# Altium PCB Madromys.PcbDoc (part 2 of 2)
Units mm, origin at the board's own origin, x right, y up, seen from the top; angles counter-clockwise.
Board outline 61.8 x 82.5 mm, 4 copper layers (Top Layer, Plane 1, Plane 2, Bottom Layer), stack 0.781 mm thick; 86 components, 51 nets, 306 pads, 237 vias.
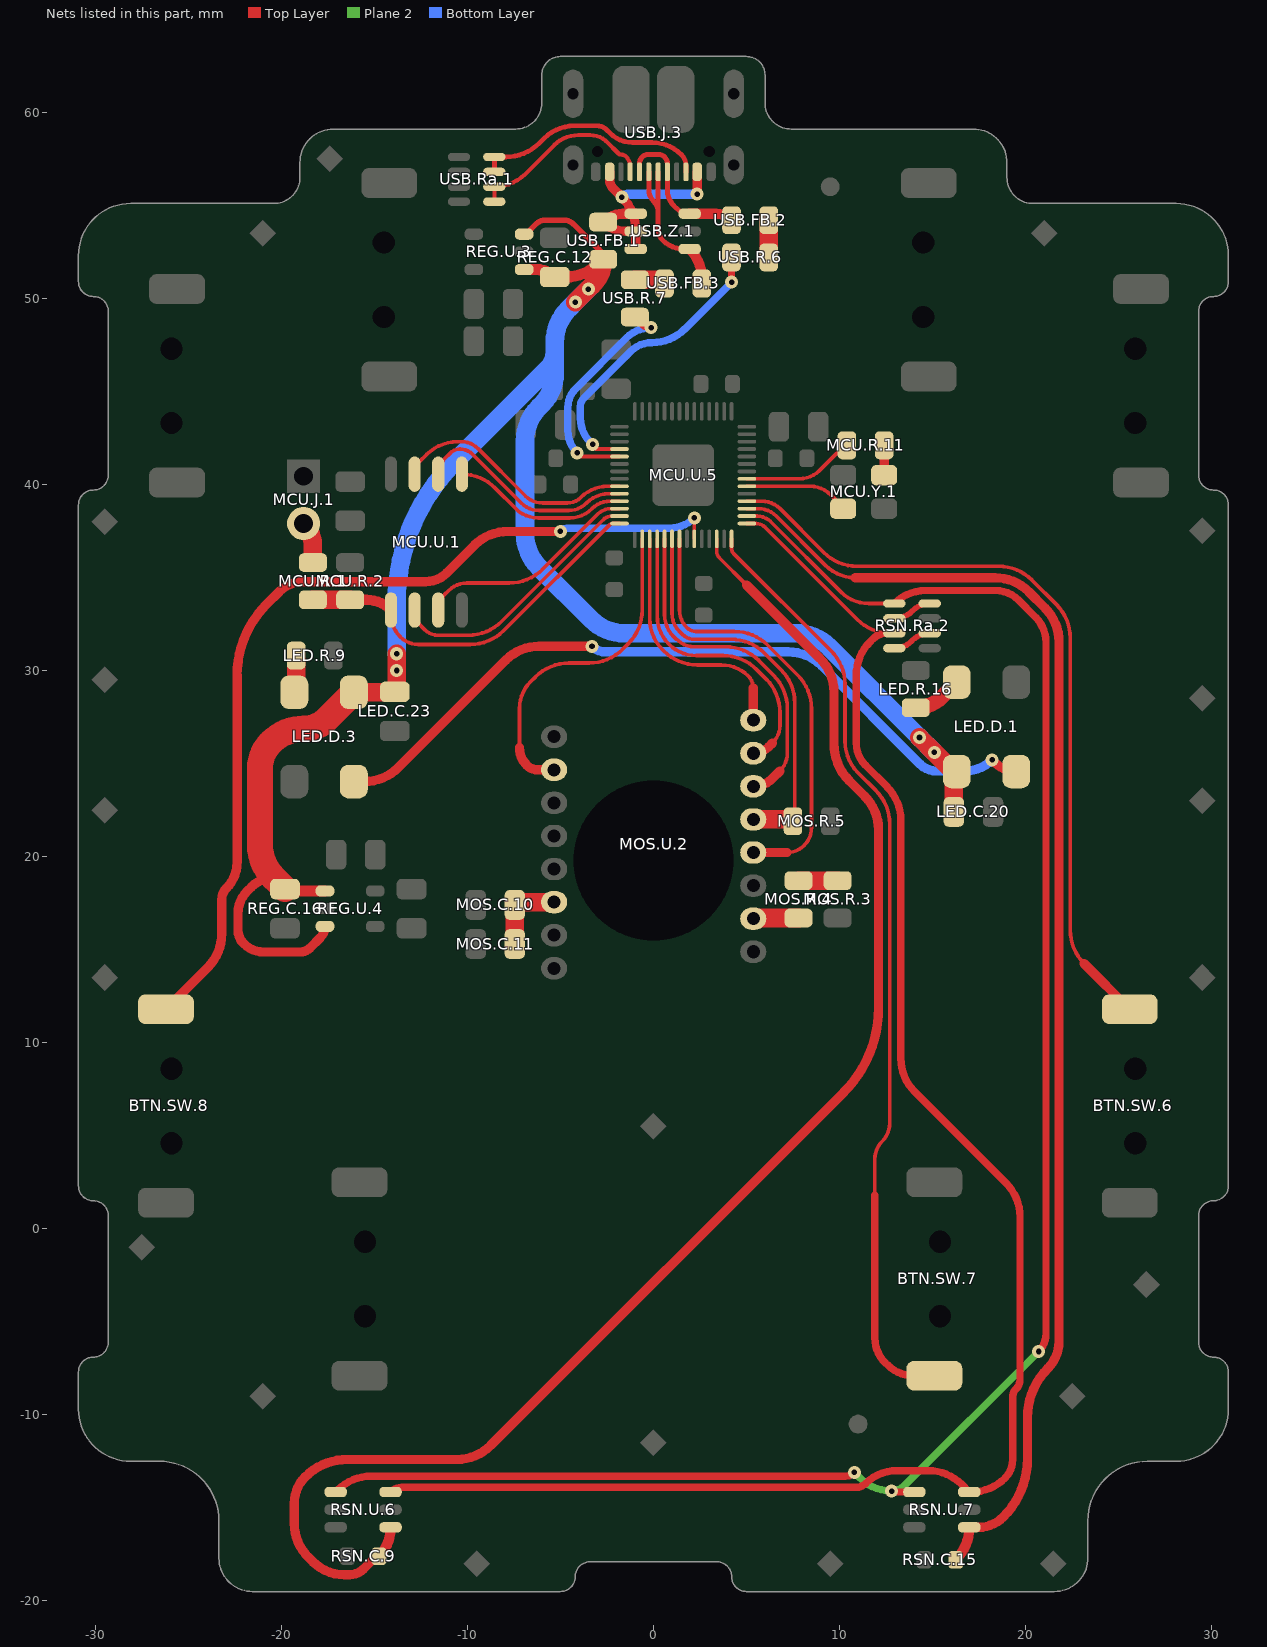
[diagram p4: the nets of this part, all layers, seen from the top]

## Via types
v1: diameter 0.7, hole 0.3, Top Layer to Bottom Layer, tented both sides, 217 vias
v2: diameter 1.016, hole 0.508, Top Layer to Bottom Layer, tented both sides, 20 vias

## Nets (pads, with @x,y where several pads share a name; then routed paths per layer and width w, separated by ;. In a path a pad name is that pad's centre, name@x,y a point inside that pad or via, vN(x,y) a via of type N, cw(c..) or ccw(c..) an arc to the next point about the centre after c; other vN are vias at no path point) (continued)
NetBTN.SW.6_B: BTN.SW.6.B MCU.U.5.18 | length 41.8
  Top Layer w0.2: MCU.U.5.18@5.025,39.1 5.834,39.1 cw(c5.834,37.734) 6.8,38.7 9.156,36.344 ccw(c10.952,38.14) 10.952,35.6 18.548,35.6 cw(c18.548,33.06) 20.344,34.856 21.656,33.544 cw(c19.86,31.748) 22.4,31.748 22.4,16.052 ccw(c24.94,16.052) 23.144,14.256
  Top Layer w0.5: 23.144,14.256 BTN.SW.6.B@25.6,11.8
NetBTN.SW.7_A: BTN.SW.7.A MCU.U.5.14 | length 50.7
  Top Layer w0.2: MCU.U.5.14@4.2,37.075 4.2,36.55 ccw(c4.562,36.55) 4.306,36.294 9.556,31.044 cw(c7.76,29.248) 10.3,29.248 10.3,26.19 ccw(c12.69,26.19) 11,24.5 11.956,23.544 cw(c10.16,21.748) 12.7,21.748 12.7,5.666 cw(c11.334,5.666) 12.3,4.7 ccw(c13.266,3.734) 11.9,3.734 11.9,1.8
  Top Layer w0.4: 11.9,1.8 11.9,-5.873 ccw(c13.778,-5.873) 12.612,-7.345 ccw(c13.952,-6.005) 13.952,-7.9 BTN.SW.7.A@15.1,-7.9
NetBTN.SW.8_B: BTN.SW.8.B MCU.U.5.9 | length 49.2
  Top Layer w0.2: MCU.U.5.9@2.2,37.075 v1(2.2,38.2)
  Top Layer w0.5: BTN.SW.8.B@-26.2,11.8 -23.944,14.056 ccw(c-25.74,15.852) -23.2,15.852 -23.2,17.696 cw(c-22.346,17.696) -22.95,18.3 ccw(c-24.338,19.688) -22.375,19.688 -22.375,29.733 cw(c-16.963,29.733) -20.79,33.56 -20.102,34.248 cw(c-18.83,32.976) -18.83,34.775 -12.247,34.775 ccw(c-12.247,36.397) -11.1,35.25 -9.619,36.731 cw(c-7.823,34.935) -7.823,37.475 v1(-5,37.475)
  Bottom Layer w0.4: v1(-5,37.475) cw(c-4.578,37.053) -4.578,37.65 0.872,37.65 ccw(c0.872,39.528) v1(2.2,38.2)
NetLED.D.1_2: LED.D.1.2 LED.D.3.4 | length 41.3
  Top Layer w0.5: LED.D.3.4@-16.1,24.03 -15.523,24.03 ccw(c-15.523,26.57) -13.726,24.774 -7.944,30.556 cw(c-6.148,28.76) -6.148,31.3 v1(-3.3,31.3) ; v1(18.2,25.2) 18.355,25.045 ccw(c19.5,26.189) LED.D.1.2@19.5,24.57
  Bottom Layer w0.5: v1(-3.3,31.3) ccw(c-2.576,32.024) -2.576,31 7.248,31 cw(c7.248,28.46) 9.044,30.256 14.346,24.954 ccw(c15.2,25.807) 15.2,24.6 16.751,24.6 ccw(c16.751,26.649) v1(18.2,25.2)
NetLED.D.1_4: LED.D.1.4 LED.R.16.1 | length 2.7
  Top Layer w0.8: LED.R.16.1@14.1,27.998 ccw(c14.1,29.996) 15.513,28.583 LED.D.1.4@16.3,29.37
NetLED.D.3_2: LED.D.3.2 LED.R.9.2 | length 2
  Top Layer w1: LED.D.3.2@-19.3,28.83 ccw(c-19.536,29.066) -19.202,29.066 LED.R.9.2@-19.202,30.8
NetMCU.J.1_2: MCU.J.1.2 MCU.R.1.1 | length 2.2
  Top Layer w1: MCU.J.1.2@-18.8,37.9 cw(c-20.007,36.693) -18.3,36.693 MCU.R.1.1@-18.3,35.802
NetMCU.R.1_2: MCU.R.1.2 MCU.R.2.2 MCU.U.1.1 MCU.U.5.56 | length 20.4
  Top Layer w0.2: MCU.U.1.1@-14.105,33.25 -14.105,33.019 ccw(c-12.381,33.019) -13.6,31.8 ccw(c-12.634,32.766) -12.634,31.4 -9.838,31.4 ccw(c-9.838,33.94) -8.042,32.144 -2.393,37.793 cw(c-2.134,37.534) -2.134,37.9 MCU.U.5.56@-1.825,37.9
  Top Layer w0.55: MCU.R.2.2@-16.3,33.798 -15.427,33.798 cw(c-15.427,31.928) MCU.U.1.1@-14.105,33.25
  Top Layer w1: MCU.R.1.2@-18.3,33.798 MCU.R.2.2@-16.3,33.798
NetMCU.R.11_1: MCU.R.11.1 MCU.U.5.21 | length 6
  Top Layer w0.2: MCU.U.5.21@5.025,40.3 7.839,40.3 ccw(c7.839,41.836) 8.925,40.75 10.188,42.013 cw(c10.398,41.804) MCU.R.11.1@10.398,42.1
NetMCU.R.11_2: MCU.R.11.2 MCU.Y.1.3 | length 1.6
  Top Layer w0.5: MCU.Y.1.3@12.4,40.5 12.402,40.502 MCU.R.11.2@12.402,42.1
NetMCU.U.1_2: MCU.U.1.2 MCU.U.5.55 | length 14.3
  Top Layer w0.2: MCU.U.1.2@-12.835,33.25 ccw(c-11.591,33.25) -12.471,32.371 -12.3,32.2 ccw(c-11.576,32.924) -11.576,31.9 -9.952,31.9 ccw(c-9.952,34.44) -8.156,32.644 -2.7,38.1 cw(c-2.217,37.617) -2.25,38.299 cw(c-2.225,37.9) -2.225,38.3 MCU.U.5.55@-1.825,38.3
NetMCU.U.1_3: MCU.U.1.3 MCU.U.5.54 | length 12
  Top Layer w0.2: MCU.U.1.3@-11.565,33.25 cw(c-10.394,33.25) -11.222,34.078 -11,34.3 cw(c-10.034,33.334) -10.034,34.7 -7.752,34.7 ccw(c-7.752,37.24) -5.956,35.444 -3,38.4 cw(c-2.276,37.676) -2.276,38.7 MCU.U.5.54@-1.825,38.7
NetMCU.U.1_5: MCU.U.1.5 MCU.U.5.53 | length 9.5
  Top Layer w0.2: MCU.U.1.5@-10.295,40.55 cw(c-10.295,38.028) -8.511,39.811 -7.4,38.7 ccw(c-6.193,39.907) -6.193,38.2 -4.5,38.2 ccw(c-4.5,39.89) -3.306,38.694 -3.3,38.7 cw(c-2.334,37.734) -2.334,39.1 MCU.U.5.53@-1.825,39.1
NetMCU.U.1_6: MCU.U.1.6 MCU.U.5.52 | length 12
  Top Layer w0.2: MCU.U.1.6@-11.565,40.55 cw(c-10.394,40.55) -11.222,41.378 -10.912,41.688 cw(c-10.4,41.176) -10.4,41.9 cw(c-10.4,40.934) -9.717,41.617 -7.1,39 ccw(c-6.134,39.966) -6.134,38.6 -4.566,38.6 ccw(c-4.566,39.966) -3.6,39 cw(c-2.393,37.793) -2.393,39.5 MCU.U.5.52@-1.825,39.5
NetMCU.U.1_7: MCU.U.1.7 MCU.U.5.51 | length 13.3
  Top Layer w0.2: MCU.U.1.7@-12.835,40.55 cw(c-11.833,40.55) -12.541,41.259 -12.2,41.6 cw(c-10.51,39.91) -10.51,42.3 -10.317,42.3 cw(c-10.317,41.051) -9.434,41.934 -6.888,39.388 ccw(c-5.951,40.324) -5.951,39 -4.624,39 ccw(c-4.624,40.024) -3.9,39.3 cw(c-2.451,37.851) -2.451,39.9 MCU.U.5.51@-1.825,39.9
NetMCU.U.5_2: MCU.U.5.2 MOS.U.2.7 | length 18
  Top Layer w0.2: -7.2,25.866 -7.2,27.951 cw(c-5.151,27.951) -6.6,29.4 -6.344,29.656 cw(c-4.548,27.86) -4.548,30.4 -3.452,30.4 ccw(c-3.452,32.94) -1.656,31.144 -1.344,31.456 ccw(c-3.14,33.252) -0.6,33.252 MCU.U.5.2@-0.6,37.075
  Top Layer w0.5: -7.2,25.866 ccw(c-5.834,25.866) -6.8,24.9 ccw(c-6.228,25.472) -6.228,24.663 MOS.U.2.7@-5.334,24.663
NetMCU.U.5_3: MCU.U.5.3 MOS.U.2.9 | length 13.6
  Top Layer w0.2: MCU.U.5.3@-0.2,37.075 -0.2,32.79 ccw(c2.19,32.79) 0.5,31.1 0.556,31.044 ccw(c2.352,32.84) 2.352,30.3 3.651,30.3 cw(c3.651,28.251) 5.1,29.7 cw(c4.457,29.057) 5.366,29.057
  Top Layer w0.5: MOS.U.2.9@5.366,27.33 5.366,29.057
NetMCU.U.5_4: MCU.U.5.4 MOS.U.2.10 | length 16.6
  Top Layer w0.2: MCU.U.5.4@0.2,37.075 0.2,32.93 ccw(c2.33,32.93) 0.824,31.424 0.845,31.403 ccw(c2.3,32.857) 2.3,30.8 3.748,30.8 cw(c3.748,28.26) 5.544,30.056 6.056,29.544 cw(c4.26,27.748) 6.8,27.748 6.8,27.066 cw(c5.434,27.066) 6.4,26.1
  Top Layer w0.5: MOS.U.2.10@5.366,25.552 ccw(c5.366,26.725) 6.195,25.895 6.4,26.1
NetMCU.U.5_5: MCU.U.5.5 MOS.U.2.11 | length 18.6
  Top Layer w0.2: MCU.U.5.5@0.6,37.075 0.6,33.007 ccw(c2.307,33.007) 1.1,31.8 1.105,31.795 ccw(c2.3,32.99) 1.334,31.604 ccw(c2.2,32.573) 2.2,31.273 3.875,31.273 cw(c3.875,28.733) 5.671,30.529 6.456,29.744 cw(c4.66,27.948) 7.2,27.948 7.2,25.566 cw(c5.834,25.566) 6.8,24.6
  Top Layer w0.5: MOS.U.2.11@5.366,23.774 ccw(c5.366,25.241) 6.404,24.204 6.8,24.6
NetMCU.U.5_6: MCU.U.5.6 MOS.R.5.1 MOS.U.2.12 | length 21.8
  Top Layer w0.2: MCU.U.5.6@1,37.075 1,33.065 ccw(c2.365,33.065) 1.4,32.1 1.564,31.936 ccw(c2.2,32.573) 2.2,31.673 4.175,31.673 cw(c4.175,29.133) 5.971,30.929 6.856,30.044 cw(c5.06,28.248) 7.6,28.248 7.6,22.147 cw(c7.251,22.147) MOS.R.5.1@7.498,21.9
  Top Layer w1: MOS.U.2.12@5.366,21.996 7.266,21.996 cw(c7.266,21.668) MOS.R.5.1@7.498,21.9
NetMCU.U.5_7: MCU.U.5.7 MOS.U.2.13 | length 24
  Top Layer w0.2: MCU.U.5.7@1.4,37.075 1.4,33.265 ccw(c2.765,33.265) 1.8,32.3 ccw(c2.283,32.783) 2.283,32.1 4.348,32.1 cw(c4.348,29.56) 6.144,31.356 7.756,29.744 cw(c5.96,27.948) 8.5,27.948 8.5,21.566 cw(c7.134,21.566) 8.1,20.6 cw(c7.178,21.522) 7.178,20.218
  Top Layer w0.5: MOS.U.2.13@5.366,20.218 7.178,20.218
NetMCU.U.5_12: MCU.U.5.12 RSN.C.9.2 RSN.U.6.4 | length 81.9
  Top Layer w0.2: MCU.U.5.12@3.4,37.075 3.4,36.388 ccw(c3.883,36.4) 3.541,36.059 5,34.6
  Top Layer w0.5: RSN.C.9.2@-14.75,-17.6 ccw(c-14.75,-17.962) -15.006,-17.706 -15.6,-18.3 cw(c-16.324,-17.576) -16.324,-18.6 -16.61,-18.6 cw(c-16.61,-16.21) -18.3,-17.9 -18.556,-17.644 cw(c-16.76,-15.848) -19.3,-15.848 -19.3,-14.752 cw(c-17.299,-14.752) -18.714,-13.337 cw(c-16.451,-15.6) -16.451,-12.4 -10.552,-12.4 ccw(c-10.552,-9.86) -8.756,-11.656 10.222,7.322 ccw(c5.689,11.856) 12.1,11.856 12.1,21.448 ccw(c9.56,21.448) 11.356,23.244 10.524,24.076 cw(c12.514,26.066) 9.7,26.066 9.7,28.848 ccw(c7.16,28.848) 8.956,30.644 5,34.6 ; RSN.U.6.4@-14.125,-16.05 RSN.U.6.4@-13.786,-16.05
  Top Layer w0.55: RSN.C.9.2@-14.75,-17.6 ccw(c-16.259,-16.091) -14.125,-16.091 RSN.U.6.4@-14.125,-16.05
NetMCU.U.5_15: MCU.U.5.15 RSN.Ra.2.3 RSN.U.6.6 RSN.U.7.6 | length 94
  Top Layer w0.2: MCU.U.5.15@5.025,37.9 5.517,37.9 cw(c5.517,37.217) 6,37.7 10.956,32.744 ccw(c12.752,34.54) RSN.Ra.2.3@12.752,32
  Top Layer w0.4: RSN.U.6.6@-14.125,-14.15 cw(c-13.521,-14.754) -13.521,-13.9 10.917,-13.9 ccw(c10.917,-13.217) 11.4,-13.7 cw(c13.09,-15.39) 13.09,-13 14.773,-13 cw(c14.773,-15.54) 16.569,-13.744 RSN.U.7.6@16.975,-14.15 17.098,-14.15 ccw(c17.098,-11.61) 18.894,-13.406 18.9,-13.4 ccw(c17.934,-12.434) 19.3,-12.434 19.3,-9.083 cw(c19.983,-9.083) 19.5,-8.6 ccw(c19.017,-8.117) 19.7,-8.117 19.7,0.648 ccw(c17.16,0.648) 18.956,2.444 14.044,7.356 cw(c15.84,9.152) 13.3,9.152 13.3,21.948 ccw(c10.76,21.948) 12.556,23.744 11.4,24.9 cw(c12.607,26.107) 10.9,26.107 10.9,29.748 cw(c13.44,29.748) 11.644,31.544 11.8,31.7 cw(c12.524,30.976) 12.524,32 12.752,32 RSN.Ra.2.3@12.95,32
NetMCU.U.5_16: MCU.U.5.16 RSN.Ra.2.1 RSN.U.6.1 RSN.U.7.1 | length 100.4
  Top Layer w0.2: MCU.U.5.16@5.025,38.3 5.576,38.3 cw(c5.576,37.276) 6.3,38 10.082,34.218 ccw(c11.574,35.711) 11.574,33.6 RSN.Ra.2.1@12.95,33.6
  Top Layer w0.4: RSN.U.6.1@-17.075,-14.15 -16.969,-14.044 cw(c-15.173,-15.84) -15.173,-13.3 10.317,-13.3 ccw(c10.317,-12.617) v1(10.8,-13.1) ; v1(12.8,-14.1) ccw(c12.921,-13.979) 12.921,-14.15 RSN.U.7.1@14.025,-14.15 ; RSN.Ra.2.1@12.95,33.6 cw(c14.64,31.91) 14.64,34.3 18.393,34.3 cw(c18.393,32.593) 19.6,33.8 20.534,32.866 cw(c19.169,31.5) 21.1,31.5 21.1,-5.634 cw(c19.734,-5.634) v1(20.7,-6.6)
  Plane 2 w0.4: v1(10.8,-13.1) 11.093,-13.393 ccw(c12.8,-11.686) v1(12.8,-14.1) ccw(c12.8,-13.134) 13.483,-13.817 v1(20.7,-6.6)
NetMCU.U.5_17: MCU.U.5.17 RSN.C.15.2 RSN.U.7.4 | length 71.7
  Top Layer w0.2: MCU.U.5.17@5.025,38.7 5.634,38.7 cw(c5.634,37.334) 6.6,38.3 9.251,35.649 ccw(c10.85,37.247) 10.85,34.986
  Top Layer w0.5: 10.85,34.986 18.362,34.986 cw(c18.362,32.446) 20.158,34.242 21.056,33.344 cw(c19.26,31.548) 21.8,31.548 21.8,-6.051 cw(c19.751,-6.051) 21.2,-7.5 ccw(c23.856,-10.156) 20.1,-10.156 20.1,-12.362 cw(c15.662,-12.362) 18.8,-15.5 cw(c17.472,-14.172) 17.472,-16.05 RSN.U.7.4@16.975,-16.05
  Top Layer w0.55: RSN.C.15.2@16.25,-17.8 ccw(c14.501,-16.05) RSN.U.7.4@16.975,-16.05
NetMCU.U.5_20: MCU.U.5.20 MCU.Y.1.1 | length 5.6
  Top Layer w0.2: MCU.U.5.20@5.025,39.9 8.417,39.9 cw(c8.417,38.312) 9.54,39.435 MCU.Y.1.1@10.147,38.828 ; MCU.Y.1.1@10.147,38.828 cw(c10.019,38.7) MCU.Y.1.1@10.2,38.7
NetMCU.U.5_46: MCU.U.5.46 USB.R.6.2 | length 16
  Top Layer w0.2: v1(-3.271,42.15) -3.3,42.121 -3.3,42.1 -3.1,41.9 MCU.U.5.46@-1.825,41.9
  Top Layer w0.4: USB.R.6.2@4.195,52.2 4.195,50.88 v1(4.2,50.875)
  Bottom Layer w0.4: v1(-3.271,42.15) -3.398,42.277 cw(c-2.124,43.55) -3.925,43.55 -3.925,44.203 cw(c-3.328,44.203) -3.75,44.625 -1.227,47.148 cw(c-0.075,45.995) -0.075,47.625 ccw(c-0.075,50.1) 1.675,48.35 v1(4.2,50.875)
NetMCU.U.5_47: MCU.U.5.47 USB.R.7.2 | length 12.5
  Top Layer w0.2: v1(-4.1,41.7) -3.9,41.5 MCU.U.5.47@-1.825,41.5
  Top Layer w0.4: USB.R.7.2@-1,48.998 -0.641,48.639 ccw(c-0.125,49.155) v1(-0.125,48.425)
  Bottom Layer w0.4: v1(-4.1,41.7) cw(c-2.893,42.907) -4.6,42.907 -4.6,44.125 cw(c-3.151,44.125) -4.176,45.149 -1.448,47.877 cw(c-0.125,46.554) v1(-0.125,48.425)
NetMOS.C.10_2: MOS.C.10.2 MOS.C.11.2 MOS.U.2.3 | length 4.3
  Top Layer w1: MOS.C.11.2@-7.447,15.3 MOS.C.10.2@-7.447,17.4 cw(c-7.083,17.035) -7.083,17.551 MOS.U.2.3@-5.334,17.551
NetMOS.R.3_1: MOS.R.3.1 MOS.R.4.2 | length 2.1
  Top Layer w1: MOS.R.4.2@7.8,18.702 MOS.R.3.1@9.9,18.702
NetMOS.R.4_1: MOS.R.4.1 MOS.U.2.15 | length 2.4
  Top Layer w1: MOS.U.2.15@5.366,16.662 cw(c5.452,16.576) 5.452,16.698 MOS.R.4.1@7.8,16.698
NetRSN.Ra.2_2: RSN.Ra.2.2 RSN.Ra.2.8 | length 2.1
  Top Layer w0.3: RSN.Ra.2.2@12.95,32.8 ccw(c12.95,34.188) 13.932,33.207 13.954,33.229 cw(c14.85,32.333) RSN.Ra.2.8@14.85,33.6
NetRSN.Ra.2_4: RSN.Ra.2.4 RSN.Ra.2.6 | length 2.1
  Top Layer w0.3: RSN.Ra.2.4@12.95,31.2 12.97,31.2 ccw(c12.97,32.48) 13.875,31.575 13.911,31.611 cw(c14.85,30.672) RSN.Ra.2.6@14.85,32
NetUSB.FB.1_1: USB.FB.1.1 USB.J.3.2 USB.J.3.11 USB.Z.1.4 USB.Z.1.5 USB.Z.1.6 | length 13.6
  Top Layer w0.5: USB.FB.1.1@-2.7,54.102 ccw(c-1.487,55.315) -1.487,53.6 USB.Z.1.5@-0.95,53.6 ; USB.J.3.11@-2.35,56.8 -2.35,56.347 ccw(c-1.753,56.347) -2.175,55.925 v1(-1.694,55.444) cw(c-3.49,53.648) -1.115,54.55 cw(c-3.49,53.648) -0.95,53.648 USB.Z.1.5@-0.95,53.6 ; USB.Z.1.6@-0.95,52.65 USB.Z.1.5@-0.95,53.6 ; v1(2.35,55.6) USB.J.3.2@2.35,56.8
  Top Layer w0.55: USB.FB.1.1@-2.7,54.102 cw(c-1.619,53.022) -1.619,54.55 -1.115,54.55 USB.Z.1.4@-0.95,54.55
  Bottom Layer w0.5: v1(-1.694,55.444) cw(c-1.317,55.067) -1.317,55.6 v1(2.35,55.6)
NetUSB.FB.2_1: USB.FB.2.1 USB.J.3.5 USB.J.3.8 USB.Z.1.3 | length 8.2
  Top Layer w0.27: USB.J.3.8@-0.75,56.8 -0.75,57.238 cw(c-0.238,57.238) -0.6,57.6 cw(c-0.298,57.298) -0.298,57.725 0.298,57.725 cw(c0.298,57.298) 0.6,57.6 cw(c0.238,57.238) 0.75,57.238 USB.J.3.5@0.75,56.8 0.75,55.82 ccw(c1.945,55.82) 1.1,54.975 1.224,54.851 ccw(c1.95,55.576) USB.Z.1.3@1.95,54.55
  Top Layer w0.55: USB.Z.1.3@1.95,54.55 3.353,54.55 cw(c3.353,53.355) USB.FB.2.1@4.198,54.2
NetUSB.FB.2_2: USB.FB.2.2 USB.R.6.1 | length 2
  Top Layer w1: USB.R.6.1@6.2,52.2 6.203,52.202 USB.FB.2.2@6.203,54.2
NetUSB.FB.3_1: USB.FB.3.1 USB.J.3.6 USB.J.3.7 USB.Z.1.1 | length 9.7
  Top Layer w0.27: USB.J.3.7@-0.25,56.8 -0.25,55.829 ccw(c0.604,55.829) 0,55.225 cw(c-0.604,54.621) 0.25,54.621 ; USB.J.3.6@0.25,56.8 0.25,54.621 ; USB.Z.1.1@1.95,52.65 1.647,52.65 cw(c1.647,54.272) 0.5,53.125 cw(c1.104,53.729) 0.25,53.729 0.25,54.621
  Top Layer w0.55: USB.Z.1.1@1.95,52.65 cw(c0.375,51.075) 2.602,51.075 USB.FB.3.1@2.602,50.8
NetUSB.FB.3_2: USB.FB.3.2 USB.R.7.1 | length 1.7
  Top Layer w1: USB.R.7.1@-1,51.002 0.109,51.002 cw(c0.109,50.311) USB.FB.3.2@0.598,50.8
NetUSB.J.3_3: USB.J.3.3 USB.Ra.1.7 USB.Ra.1.8 | length 12.8
  Top Layer w0.26: USB.Ra.1.7@-8.55,56.8 USB.Ra.1.8@-8.55,57.6 -7.927,57.6 ccw(c-7.927,60.14) -6.131,58.344 -5.875,58.6 cw(c-4.245,56.97) -4.245,59.275 -3.043,59.275 cw(c-3.043,58.507) -2.5,59.05 -2.32,58.87 ccw(c-1.125,60.065) -1.125,58.375 -0.069,58.375 cw(c-0.069,56.156) 1.5,57.725 cw(c0.896,57.121) 1.75,57.121 USB.J.3.3@1.75,56.8
NetUSB.J.3_9: USB.J.3.9 USB.Ra.1.5 USB.Ra.1.6 | length 10.1
  Top Layer w0.22: USB.Ra.1.5@-8.55,55.2 USB.Ra.1.6@-8.55,56 ccw(c-8.55,58.354) -6.886,56.689 -5.35,58.225 cw(c-4.022,56.897) -4.022,58.775 -3.406,58.775 cw(c-3.406,57.467) -2.566,58.469 ccw(c-1.125,60.065) -2.521,58.43 -1.863,57.772 ccw(c-1.75,57.885) -1.75,57.725 -1.716,57.725 cw(c-1.716,57.384) -1.475,57.625 cw(c-2.018,57.082) -1.25,57.082 USB.J.3.9@-1.25,56.8
V_USB: LED.C.20.2 LED.C.23.2 LED.D.1.1 LED.D.3.1 REG.C.12.2 REG.C.16.2 REG.U.3.1 REG.U.3.3 REG.U.4.1 REG.U.4.3 USB.FB.1.2 | length 109.7
  Top Layer w0.3: REG.U.3.3@-6.95,53.45 ccw(c-6.95,53.691) -6.78,53.52 -6.3,54 cw(c-5.817,53.517) -5.817,54.2 -4.8,54.2 cw(c-4.8,53.476) -4.288,53.988 -2.914,52.614 cw(c-3.43,52.098) USB.FB.1.2@-2.7,52.098
  Top Layer w0.5: -20.406,18.859 ccw(c-20.406,17.144) -21.619,18.356 -21.812,18.163 ccw(c-20.575,16.925) -22.325,16.925 -22.325,16.049 ccw(c-21.301,16.049) -22.025,15.325 ccw(c-20.939,16.411) -20.939,14.875 -18.958,14.875 ccw(c-18.958,15.558) -18.475,15.075 -17.898,15.652 ccw(c-18.495,16.25) REG.U.4.3@-17.65,16.25
  Top Layer w0.6: REG.C.16.2@-19.8,18.253 ccw(c-19.553,18.5) -19.553,18.15 REG.U.4.1@-17.65,18.15 ; REG.U.3.1@-6.95,51.55 -6.271,51.55 cw(c-6.271,50.176) REG.C.12.2@-5.3,51.148 -4.702,51.148 ccw(c-4.702,53.688) -2.906,51.892 USB.FB.1.2@-2.7,52.098
  Top Layer w0.7: LED.D.1.1@16.148,24.202 cw(c16.668,24.202) LED.D.1.1@16.3,24.57
  Top Layer w1: LED.D.3.1@-16.1,28.83 -13.955,28.83 ccw(c-14.328,29.203) -13.8,29.203 v1(-13.8,30) v1(-13.8,30.9) ; v1(-4.2,49.8) v1(-3.5,50.5) -3.264,50.736 ccw(c-4.625,52.098) USB.FB.1.2@-2.7,52.098 ; v1(14.3,26.4) v1(15.1,25.6) 16.009,24.691 ccw(c16.3,24.982) LED.D.1.1@16.3,24.57 ; LED.C.20.2@16.148,22.4 LED.D.1.1@16.148,24.202
  Top Layer w1.4: REG.C.16.2@-19.8,18.253 -20.406,18.859 cw(c-18.61,20.655) -21.15,20.655 -21.15,24.721 cw(c-19.152,24.721) -20.565,26.134 cw(c-18.775,24.344) -18.775,26.875 ccw(c-18.775,28.614) -17.545,27.384 LED.D.3.1@-16.1,28.83
  Bottom Layer w1: v1(-13.8,30.9) -13.8,33.679 cw(c-3.126,33.679) -10.674,41.226 -5.653,46.247 ; v1(-3.5,50.5) v1(-4.2,49.8) -4.556,49.444 ccw(c-2.76,47.648) -5.3,47.648 -5.3,47.1 ; v1(15.1,25.6) v1(14.3,26.4) 9.444,31.256 ccw(c7.648,29.46) 7.648,32 -1.548,32 cw(c-1.548,34.54) -3.344,32.744 -6.156,35.556 cw(c-4.36,37.352) -6.9,37.352 -6.9,42.348 cw(c-4.36,42.348) -6.156,44.144 -6,44.3 ccw(c-7.69,45.99) -5.3,45.99 -5.3,47.1 ; -5.653,46.247 ccw(c-6.506,47.1) -5.648,46.252 ; -5.653,46.247 ccw(c-6.507,47.1) -5.648,46.252 ; -5.648,46.252 ccw(c-6.507,47.1) -5.3,47.1 ; -5.648,46.252 ccw(c-6.506,47.1) -5.3,47.1
pads on no net: BTN.SW.1. BTN.SW.2. BTN.SW.3. BTN.SW.4. BTN.SW.5. BTN.SW.6. BTN.SW.7. BTN.SW.8. LED.R.9.1 MCH.FID.1.1 MCH.FID.2.1 MCU.U.5.24 MCU.U.5.25 MOS.U.2. MOS.U.2.1 MOS.U.2.2 MOS.U.2.6 MOS.U.2.14 MOS.U.2.16 REG.U.3.4 REG.U.4.4 USB.J.3. USB.J.3.4 USB.J.3.10

## Polygon pours and split planes (outlines as drawn)
GND on Top Layer "GND_L01_P013" (solid, remove dead copper, pour order 13): -31,63 31,63 31,-20 -31,-20
3V3 on Top Layer "3V3_L01_P012" (solid, remove dead copper, pour order 12): -1,43.925 -1,45.2 -1.3,45.5 -3.5,45.5 -3.9,45.1 -3.9,43.8 -3.7,43.6 -2.5,43.6 -2.2,43.3 -2.2,42.7 -1.4,42.7 -1.4,43.1 -1,43.5
3V3 on Top Layer "3V3_L01_P011" (solid, remove dead copper, pour order 11): -8.7,51.9 -8.7,46.7 -9.3,46.1 -11.3,46.1 -12.1,46.9 -12.1,52.1 -11.5,52.7 -9.5,52.7
GND on Plane 2 "GND_L03_P015" (solid, remove dead copper, pour order 15): -31,63 31,63 31,-20 -31,-20
3V3 on Plane 2 "3V3_L03_P010" (solid, remove dead copper, pour order 10): 5,55 17,43 17,18 6,7 -7,7 -22,22 -22,45 -12,55
GND on Plane 1 "GND_L02_P014" (solid, remove dead copper, pour order 14): -31,63 31,63 31,-20 -31,-20
GND on Bottom Layer "GND_L04_P016" (solid, remove dead copper, pour order 16): -31,63 31,63 31,-20 -31,-20

## Keep-outs
Keep-Out Layer:
  lines w0.2: -30.9,27.158 -23.3,27.158 -23.3,20.594 -27.643,20.594 -27.644,20.605 -27.646,20.617 -27.647,20.628 -27.648,20.639 -27.65,20.651 -27.651,20.662 -27.652,20.673 -27.654,20.685 -27.655,20.696 -27.656,20.707 -27.658,20.719 -27.659,20.73 -27.661,20.741 -27.662,20.753 -27.663,20.764 -27.665,20.775 -27.666,20.787 -27.667,20.798 -27.668,20.809 -27.67,20.821 -27.671,20.832 -27.672,20.843 -27.674,20.855 -27.675,20.866 -27.676,20.877 -27.678,20.888 -27.679,20.9 -27.68,20.911 -27.681,20.922 -27.683,20.934 -27.684,20.945 -27.685,20.956 -27.686,20.968 -27.688,20.979 -27.689,20.99 -27.69,21.002 -27.691,21.013 -27.693,21.024 -27.694,21.036 -27.695,21.047 -27.696,21.058 -27.697,21.07 -27.699,21.081 -27.7,21.092 -27.701,21.104 -27.702,21.115 -27.703,21.127 -27.705,21.138 -27.706,21.149 -27.707,21.161 -27.708,21.172 -27.709,21.183 -27.71,21.195 -27.712,21.206 -27.713,21.217 -27.714,21.229 -27.715,21.24 -27.716,21.251 -27.717,21.263 -27.718,21.274 -27.72,21.285 -27.721,21.297 -27.722,21.308 -27.723,21.319 -27.724,21.331 -27.725,21.342 -27.726,21.353 -27.727,21.365 -27.728,21.376 -27.729,21.387 -27.731,21.399 -27.732,21.41 -27.733,21.421 -27.734,21.433 -27.735,21.444 -27.736,21.456 -27.737,21.467 -27.738,21.478 -27.739,21.49 -27.74,21.501 -27.741,21.512 -27.742,21.524 -27.743,21.535 -27.744,21.546 -27.745,21.558 -27.746,21.569 -27.747,21.58 -27.748,21.592 -27.749,21.603 -27.75,21.615 -27.751,21.626 -27.752,21.637 -27.753,21.649 -27.754,21.66 -27.755,21.671 -27.756,21.683 -27.757,21.694 -27.758,21.705 -27.759,21.717 -27.76,21.728 -27.764,21.773 -27.769,21.818 -27.774,21.863 -27.78,21.908 -27.787,21.953 -27.794,21.997 -27.802,22.042 -27.811,22.086 -27.82,22.131 -27.83,22.175 -27.841,22.219 -27.852,22.263 -27.864,22.306 -27.877,22.35 -27.89,22.393 -27.904,22.436 -27.918,22.479 -27.933,22.522 -27.949,22.564 -27.965,22.606 -27.982,22.648 -28,22.69 -28.018,22.731 -28.036,22.772 -28.056,22.813 -28.076,22.853 -28.096,22.894 -28.117,22.933 -28.139,22.973 -28.161,23.012 -28.184,23.051 -28.207,23.09 -28.231,23.128 -28.256,23.166 -28.281,23.203 -28.307,23.24 -28.333,23.277 -28.36,23.313 -28.387,23.349 -28.414,23.384 -28.443,23.419 -28.472,23.454 -28.501,23.488 -28.531,23.522 -28.561,23.555 -28.592,23.588 -28.623,23.62 -28.654,23.652 -28.687,23.684 -28.719,23.714 -28.752,23.745 -28.786,23.775 -28.82,23.804 -28.854,23.833 -28.889,23.861 -28.924,23.889 -28.96,23.916 -28.996,23.943 -29.032,23.969 -29.069,23.995 -29.106,24.02 -29.143,24.045 -29.181,24.069 -29.219,24.092 -29.258,24.115 -29.297,24.137 -29.336,24.159 -29.375,24.18 -29.415,24.2 -29.455,24.22 -29.496,24.239 -29.536,24.258 -29.577,24.276 -29.618,24.293 -29.66,24.31 -29.702,24.326 -29.743,24.341 -29.786,24.356 -29.828,24.371 -29.87,24.384 -29.913,24.397 -29.956,24.409 -29.999,24.421 -30.042,24.432 -30.086,24.442 -30.129,24.452 -30.173,24.461 -30.217,24.469 -30.261,24.477 -30.305,24.484 -30.349,24.491 -30.393,24.496 -30.438,24.501 -30.482,24.506 -30.526,24.509 -30.571,24.512 -30.615,24.515 -30.66,24.516 -30.705,24.517 -30.749,24.518 ; -22.87,55.1 -21.861,50.991 -19.334,51.611 -20.19,55.1 ; 20.19,55.1 19.334,51.611 21.861,50.991 22.87,55.1 ; 30.749,24.518 30.705,24.517 30.66,24.516 30.616,24.515 30.571,24.512 30.526,24.509 30.482,24.506 30.438,24.501 30.393,24.496 30.349,24.491 30.305,24.484 30.261,24.477 30.217,24.469 30.173,24.461 30.129,24.452 30.086,24.442 30.042,24.432 29.999,24.421 29.956,24.409 29.913,24.397 29.87,24.384 29.828,24.371 29.786,24.356 29.743,24.341 29.702,24.326 29.66,24.31 29.618,24.293 29.577,24.276 29.536,24.258 29.496,24.239 29.455,24.22 29.415,24.2 29.375,24.18 29.336,24.159 29.297,24.137 29.258,24.115 29.219,24.092 29.181,24.069 29.143,24.045 29.106,24.02 29.069,23.995 29.032,23.969 28.996,23.943 28.96,23.916 28.924,23.889 28.889,23.861 28.854,23.833 28.82,23.804 28.786,23.775 28.752,23.745 28.719,23.714 28.687,23.684 28.654,23.652 28.623,23.62 28.592,23.588 28.561,23.555 28.531,23.522 28.501,23.488 28.472,23.454 28.443,23.419 28.415,23.384 28.387,23.349 28.36,23.313 28.333,23.277 28.307,23.24 28.281,23.203 28.256,23.166 28.231,23.128 28.207,23.09 28.184,23.051 28.161,23.012 28.139,22.973 28.117,22.933 28.096,22.894 28.076,22.853 28.056,22.813 28.036,22.772 28.018,22.731 28,22.69 27.982,22.648 27.965,22.606 27.949,22.564 27.933,22.522 27.918,22.479 27.904,22.436 27.89,22.393 27.877,22.35 27.864,22.306 27.852,22.263 27.841,22.219 27.83,22.175 27.82,22.131 27.811,22.086 27.802,22.042 27.794,21.997 27.787,21.953 27.78,21.908 27.774,21.863 27.769,21.818 27.764,21.773 27.76,21.728 27.759,21.717 27.758,21.705 27.757,21.694 27.756,21.683 27.755,21.671 27.754,21.66 27.753,21.649 27.752,21.637 27.751,21.626 27.75,21.615 27.749,21.603 27.748,21.592 27.747,21.58 27.746,21.569 27.745,21.558 27.744,21.546 27.743,21.535 27.742,21.524 27.741,21.512 27.74,21.501 27.739,21.49 27.738,21.478 27.737,21.467 27.736,21.456 27.735,21.444 27.734,21.433 27.733,21.421 27.732,21.41 27.731,21.399 27.729,21.387 27.728,21.376 27.727,21.365 27.726,21.353 27.725,21.342 27.724,21.331 27.723,21.319 27.722,21.308 27.721,21.297 27.72,21.285 27.718,21.274 27.717,21.263 27.716,21.251 27.715,21.24 27.714,21.229 27.713,21.217 27.712,21.206 27.71,21.195 27.709,21.183 27.708,21.172 27.707,21.161 27.706,21.149 27.705,21.138 27.703,21.127 27.702,21.115 27.701,21.104 27.7,21.092 27.699,21.081 27.697,21.07 27.696,21.058 27.695,21.047 27.694,21.036 27.693,21.024 27.691,21.013 27.69,21.002 27.689,20.99 27.688,20.979 27.686,20.968 27.685,20.956 27.684,20.945 27.683,20.934 27.681,20.922 27.68,20.911 27.679,20.9 27.678,20.888 27.676,20.877 27.675,20.866 27.674,20.855 27.672,20.843 27.671,20.832 27.67,20.821 27.668,20.809 27.667,20.798 27.666,20.787 27.665,20.775 27.663,20.764 27.662,20.753 27.661,20.741 27.659,20.73 27.658,20.719 27.657,20.707 27.655,20.696 27.654,20.685 27.652,20.673 27.651,20.662 27.65,20.651 27.648,20.639 27.647,20.628 27.646,20.617 27.644,20.605 27.643,20.594 23.3,20.594 23.3,27.158 30.9,27.158 ; -25.698,-1.966 -19.95,-1.966 -19.95,-0.566 cw(c-18.95,-0.566) -18.95,0.434 -11.75,0.434 cw(c-11.75,-0.566) -10.75,-0.566 -10.75,-1.966 10.75,-1.966 10.75,-0.566 cw(c11.75,-0.566) 11.75,0.434 18.95,0.434 cw(c18.95,-0.566) 19.95,-0.566 19.95,-1.966 25.698,-1.966 25.662,-1.938 25.626,-1.911 25.59,-1.884 25.553,-1.856 25.517,-1.829 25.481,-1.802 25.444,-1.775 25.408,-1.748 25.371,-1.722 25.335,-1.695 25.298,-1.669 25.261,-1.642 25.224,-1.616 25.187,-1.59 25.151,-1.564 25.113,-1.538 25.076,-1.512 25.039,-1.486 25.002,-1.46 24.965,-1.435 24.927,-1.409 24.89,-1.384 24.852,-1.358 24.815,-1.333 24.777,-1.308 24.739,-1.283 24.701,-1.258 24.664,-1.233 24.626,-1.209 24.588,-1.184 24.55,-1.16 24.512,-1.135 24.473,-1.111 24.435,-1.087 24.397,-1.063 24.358,-1.039 24.32,-1.015 24.282,-0.991 24.243,-0.968 24.204,-0.944 24.166,-0.921 24.127,-0.897 24.088,-0.874 24.049,-0.851 24.01,-0.828 23.971,-0.805 23.932,-0.782 23.893,-0.759 23.854,-0.737 23.815,-0.714 23.776,-0.692 23.736,-0.67 23.697,-0.648 23.657,-0.625 23.618,-0.604 23.578,-0.582 23.539,-0.56 23.499,-0.538 23.459,-0.517 23.419,-0.495 23.38,-0.474 23.34,-0.453 23.3,-0.432 23.26,-0.411 23.22,-0.39 23.179,-0.369 23.139,-0.348 23.099,-0.328 23.059,-0.308 23.018,-0.287 22.978,-0.267 22.937,-0.247 22.897,-0.227 22.856,-0.207 22.816,-0.187 22.775,-0.168 22.734,-0.148 22.694,-0.129 22.653,-0.109 22.612,-0.09 22.571,-0.071 22.53,-0.052 22.489,-0.033 22.448,-0.014 22.407,0.004 22.366,0.023 22.324,0.041 22.283,0.06 22.242,0.078 22.2,0.096 22.159,0.114 22.118,0.132 22.076,0.15 22.035,0.167 21.993,0.185 21.951,0.202 21.91,0.22 21.868,0.237 21.826,0.254 21.784,0.271 21.731,0.293 21.678,0.317 21.625,0.341 21.573,0.366 21.521,0.393 21.47,0.42 21.42,0.448 21.37,0.478 21.32,0.508 21.271,0.539 21.223,0.571 21.175,0.605 21.128,0.639 21.082,0.674 21.036,0.71 20.991,0.746 20.947,0.784 20.903,0.823 20.86,0.862 20.818,0.902 20.777,0.943 20.736,0.985 20.696,1.028 20.658,1.071 20.619,1.115 20.582,1.16 20.546,1.206 20.51,1.252 20.476,1.299 20.442,1.347 20.409,1.395 20.377,1.444 20.346,1.493 20.316,1.544 20.287,1.594 20.259,1.646 20.232,1.697 20.206,1.75 20.181,1.803 20.156,1.856 20.133,1.91 20.111,1.964 20.09,2.019 20.07,2.074 20.051,2.129 20.033,2.185 20.016,2.241 20.001,2.297 19.986,2.354 19.972,2.411 19.96,2.469 19.948,2.526 19.938,2.584 19.929,2.642 19.92,2.7 19.913,2.758 19.907,2.816 19.903,2.875 19.899,2.934 19.896,2.992 19.895,3.051 19.894,3.11 19.895,3.168 19.897,3.227 19.9,3.285 19.904,3.344 19.909,3.402 19.915,3.461 19.923,3.519 19.931,3.577 19.941,3.635 19.951,3.693 19.963,3.75 19.976,3.807 19.99,3.864 20.005,3.921 20.021,3.977 20.038,4.033 20.056,4.089 20.076,4.144 20.096,4.199 20.117,4.254 20.14,4.308 20.163,4.362 20.188,4.415 20.213,4.468 20.239,4.52 20.267,4.571 20.295,4.623 20.325,4.673 20.355,4.723 20.386,4.773 20.418,4.821 20.451,4.869 20.485,4.917 20.52,4.964 20.556,5.01 20.593,5.055 20.63,5.1 20.669,5.144 20.684,5.161 20.699,5.178 20.714,5.195 20.729,5.212 20.745,5.229 20.76,5.247 20.775,5.264 20.79,5.281 20.805,5.298 20.82,5.315 20.835,5.333 20.85,5.35 20.865,5.367 20.88,5.384 20.895,5.402 20.91,5.419 20.925,5.436 20.94,5.454 20.955,5.471 20.97,5.488 20.985,5.506 21,5.523 21.015,5.54 21.03,5.558 21.045,5.575 21.06,5.593 21.075,5.61 21.089,5.628 21.104,5.645 21.119,5.663 21.134,5.68 21.149,5.698 21.164,5.715 21.178,5.733 21.193,5.75 21.208,5.768 21.222,5.785 21.237,5.803 21.252,5.82 21.267,5.838 21.281,5.856 21.296,5.873 21.31,5.891 21.325,5.908 21.34,5.926 21.354,5.944 21.369,5.961 21.383,5.979 21.398,5.997 21.413,6.015 21.427,6.032 21.442,6.05 21.456,6.068 21.471,6.086 21.485,6.103 21.499,6.121 21.514,6.139 21.528,6.157 21.543,6.175 21.557,6.192 21.571,6.21 21.586,6.228 21.6,6.246 21.614,6.264 21.629,6.282 21.643,6.3 21.657,6.318 21.672,6.336 21.686,6.353 21.7,6.371 21.714,6.389 21.729,6.407 21.743,6.425 21.757,6.443 21.771,6.461 21.785,6.479 21.8,6.497 21.814,6.515 21.828,6.534 21.842,6.552 21.856,6.57 21.87,6.588 21.884,6.606 21.898,6.624 21.912,6.642 21.926,6.66 21.94,6.678 21.954,6.697 21.968,6.715 21.982,6.733 21.996,6.751 22.01,6.769 22.024,6.788 22.038,6.806 22.052,6.824 22.066,6.842 22.079,6.861 22.093,6.879 22.107,6.897 22.121,6.916 ccw(c21.322,7.518) 22.322,7.518 22.322,8.034 12.09,8.034 cw(c0,19.986) -12.09,8.034 -22.322,8.034 -22.322,7.518 ccw(c-21.322,7.518) -22.121,6.916 -22.107,6.897 -22.093,6.879 -22.079,6.861 -22.066,6.842 -22.052,6.824 -22.038,6.806 -22.024,6.788 -22.01,6.769 -21.996,6.751 -21.982,6.733 -21.968,6.715 -21.954,6.697 -21.94,6.678 -21.926,6.66 -21.912,6.642 -21.898,6.624 -21.884,6.606 -21.87,6.588 -21.856,6.57 -21.842,6.552 -21.828,6.534 -21.814,6.515 -21.8,6.497 -21.785,6.479 -21.771,6.461 -21.757,6.443 -21.743,6.425 -21.729,6.407 -21.714,6.389 -21.7,6.371 -21.686,6.353 -21.672,6.336 -21.657,6.318 -21.643,6.3 -21.629,6.282 -21.614,6.264 -21.6,6.246 -21.586,6.228 -21.571,6.21 -21.557,6.192 -21.543,6.175 -21.528,6.157 -21.514,6.139 -21.499,6.121 -21.485,6.103 -21.471,6.086 -21.456,6.068 -21.442,6.05 -21.427,6.032 -21.413,6.015 -21.398,5.997 -21.383,5.979 -21.369,5.961 -21.354,5.944 -21.34,5.926 -21.325,5.908 -21.31,5.891 -21.296,5.873 -21.281,5.856 -21.267,5.838 -21.252,5.82 -21.237,5.803 -21.222,5.785 -21.208,5.768 -21.193,5.75 -21.178,5.733 -21.163,5.715 -21.149,5.698 -21.134,5.68 -21.119,5.663 -21.104,5.645 -21.089,5.628 -21.075,5.61 -21.06,5.593 -21.045,5.575 -21.03,5.558 -21.015,5.54 -21,5.523 -20.985,5.506 -20.97,5.488 -20.955,5.471 -20.94,5.454 -20.925,5.436 -20.91,5.419 -20.895,5.402 -20.88,5.384 -20.865,5.367 -20.85,5.35 -20.835,5.333 -20.82,5.315 -20.805,5.298 -20.79,5.281 -20.775,5.264 -20.76,5.247 -20.745,5.229 -20.729,5.212 -20.714,5.195 -20.699,5.178 -20.684,5.161 -20.669,5.144 -20.63,5.1 -20.593,5.055 -20.556,5.01 -20.52,4.964 -20.485,4.917 -20.451,4.869 -20.418,4.821 -20.386,4.773 -20.355,4.723 -20.325,4.673 -20.295,4.623 -20.267,4.571 -20.239,4.52 -20.213,4.468 -20.188,4.415 -20.163,4.362 -20.14,4.308 -20.117,4.254 -20.096,4.199 -20.076,4.144 -20.056,4.089 -20.038,4.033 -20.021,3.977 -20.005,3.921 -19.99,3.864 -19.976,3.807 -19.963,3.75 -19.951,3.693 -19.941,3.635 -19.931,3.577 -19.923,3.519 -19.915,3.461 -19.909,3.402 -19.904,3.344 -19.9,3.285 -19.897,3.227 -19.895,3.168 -19.894,3.11 -19.895,3.051 -19.896,2.992 -19.899,2.934 -19.903,2.875 -19.907,2.816 -19.913,2.758 -19.92,2.7 -19.929,2.642 -19.938,2.584 -19.948,2.526 -19.96,2.469 -19.972,2.411 -19.986,2.354 -20.001,2.297 -20.016,2.241 -20.033,2.185 -20.051,2.129 -20.07,2.074 -20.09,2.019 -20.111,1.964 -20.133,1.91 -20.156,1.856 -20.181,1.803 -20.206,1.75 -20.232,1.697 -20.259,1.646 -20.287,1.594 -20.316,1.544 -20.346,1.493 -20.377,1.444 -20.409,1.395 -20.442,1.347 -20.476,1.299 -20.51,1.252 -20.546,1.206 -20.582,1.16 -20.619,1.115 -20.658,1.071 -20.696,1.028 -20.736,0.985 -20.777,0.943 -20.818,0.902 -20.86,0.862 -20.903,0.823 -20.947,0.784 -20.991,0.746 -21.036,0.71 -21.082,0.674 -21.128,0.639 -21.175,0.605 -21.223,0.571 -21.271,0.539 -21.32,0.508 -21.37,0.478 -21.42,0.448 -21.47,0.42 -21.521,0.393 -21.573,0.366 -21.625,0.341 -21.678,0.317 -21.731,0.293 -21.784,0.271 -21.826,0.254 -21.868,0.237 -21.91,0.22 -21.951,0.202 -21.993,0.185 -22.035,0.167 -22.076,0.15 -22.118,0.132 -22.159,0.114 -22.2,0.096 -22.242,0.078 -22.283,0.06 -22.324,0.041 -22.366,0.023 -22.407,0.004 -22.448,-0.014 -22.489,-0.033 -22.53,-0.052 -22.571,-0.071 -22.612,-0.09 -22.653,-0.109 -22.694,-0.129 -22.734,-0.148 -22.775,-0.168 -22.816,-0.187 -22.856,-0.207 -22.897,-0.227 -22.937,-0.247 -22.978,-0.267 -23.018,-0.287 -23.059,-0.308 -23.099,-0.328 -23.139,-0.348 -23.179,-0.369 -23.22,-0.39 -23.26,-0.411 -23.3,-0.432 -23.34,-0.453 -23.38,-0.474 -23.419,-0.495 -23.459,-0.517 -23.499,-0.538 -23.539,-0.56 -23.578,-0.582 -23.618,-0.604 -23.657,-0.625 -23.697,-0.648 -23.736,-0.67 -23.776,-0.692 -23.815,-0.714 -23.854,-0.737 -23.893,-0.759 -23.932,-0.782 -23.971,-0.805 -24.01,-0.828 -24.049,-0.851 -24.088,-0.874 -24.127,-0.897 -24.166,-0.921 -24.204,-0.944 -24.243,-0.968 -24.282,-0.991 -24.32,-1.015 -24.358,-1.039 -24.397,-1.063 -24.435,-1.087 -24.473,-1.111 -24.512,-1.135 -24.55,-1.16 -24.588,-1.184 -24.626,-1.209 -24.664,-1.233 -24.701,-1.258 -24.739,-1.283 -24.777,-1.308 -24.815,-1.333 -24.852,-1.358 -24.89,-1.384 -24.927,-1.409 -24.965,-1.435 -25.002,-1.46 -25.039,-1.486 -25.076,-1.512 -25.113,-1.538 -25.151,-1.564 -25.187,-1.59 -25.224,-1.616 -25.261,-1.642 -25.298,-1.669 -25.335,-1.695 -25.371,-1.722 -25.408,-1.748 -25.444,-1.775 -25.481,-1.802 -25.517,-1.829 -25.553,-1.856 -25.59,-1.884 -25.626,-1.911 -25.662,-1.938 -25.698,-1.966

## Silkscreen, mask and mechanical layers (free items; w line width, h text height)
Top Overlay:
  text "BOOT / LOADER" at -29.3,32.7 h3
  text "R2.002" at -29.5,17 h3
  text "Licensed under the / CERN-OHL-S v2 / Copyright Ploopy  / 2025" at 13.5,12.5 h2
Board Outline:
  the board outline again, w0.2

## Text inside footprints (layer, text, board x,y; h text height)
MCH.LOGO.2: Top Overlay "X" at 0.799,0.2 h1.4
MOS.U.2: Top Overlay "Optic Side" at -3.8,29.6 h2; Bottom Overlay "1" at -1.834,10.495 h4 r90; Bottom Overlay "Sensor Side" at 4.466,29.145 h2